# Altium PCB MACHIN2.PcbDoc
Units mm, origin at the board's own origin, x right, y up, seen from the top; angles counter-clockwise.
Board outline 83 x 53 mm, 4 copper layers (Top Layer, Internal Plane 1, Internal Plane 2, Bottom Layer), stack 0.462 mm thick; 6 components, 12 nets, 60 pads, 0 vias.
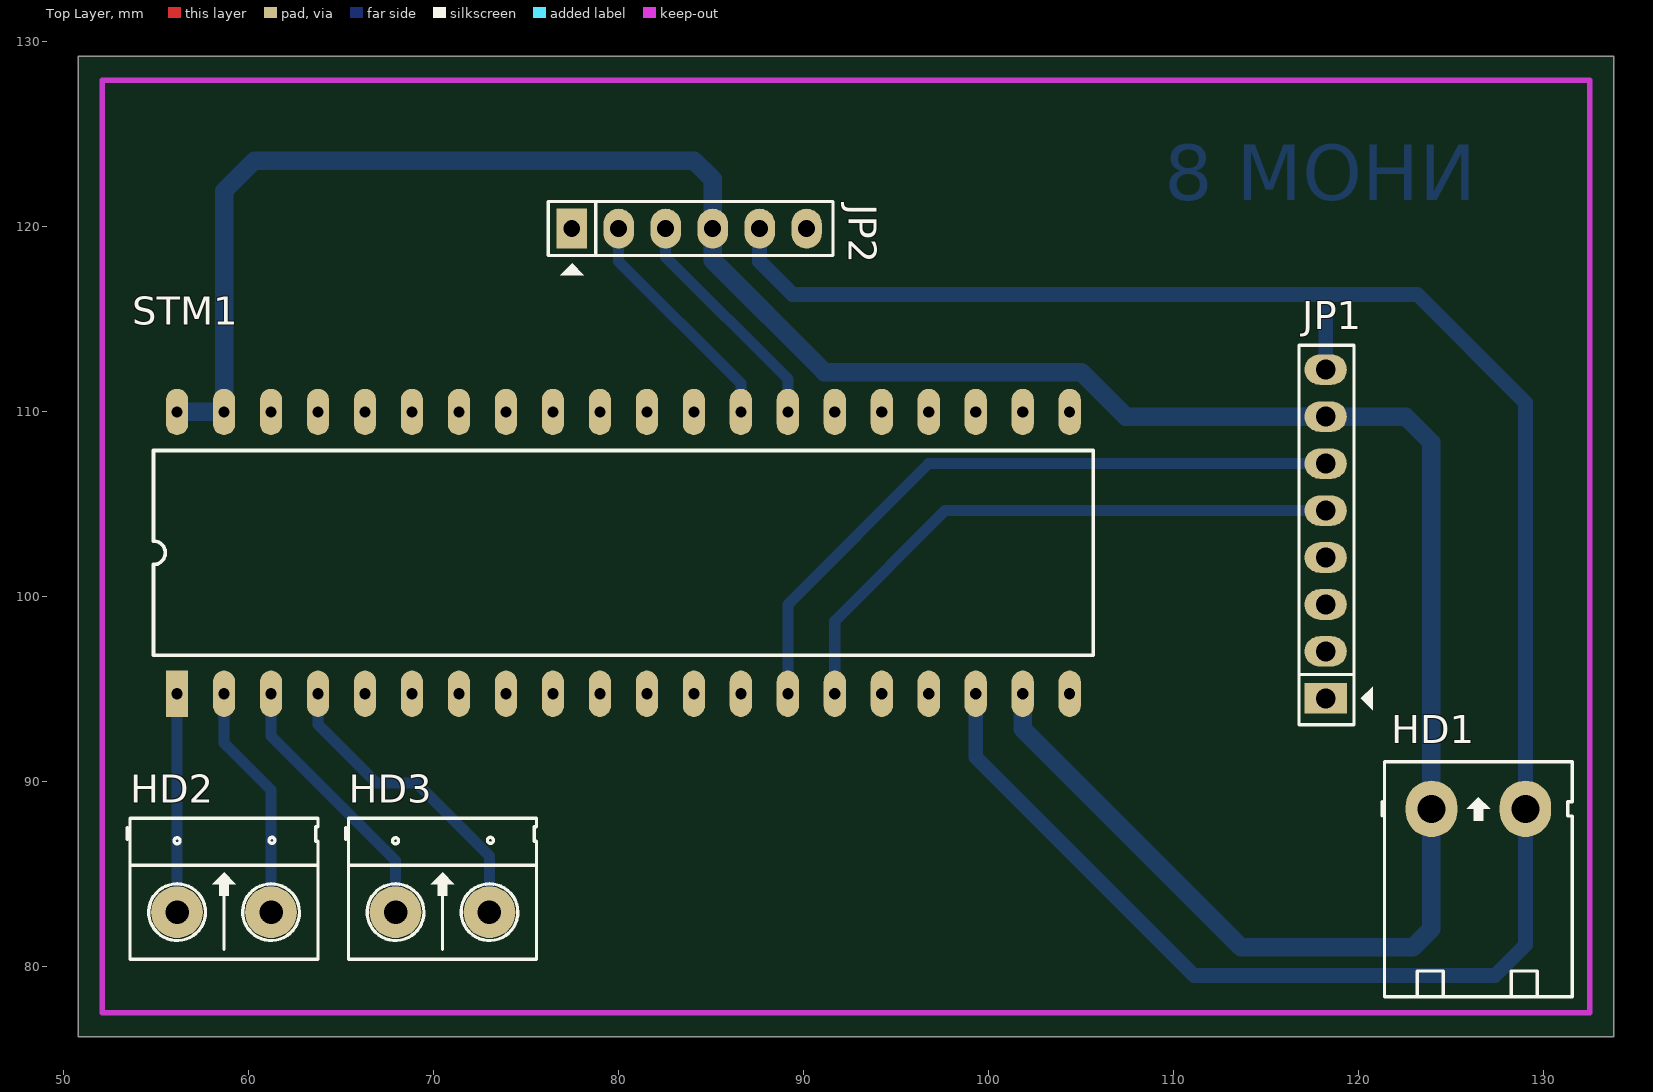
[diagram p0: Top Layer view]
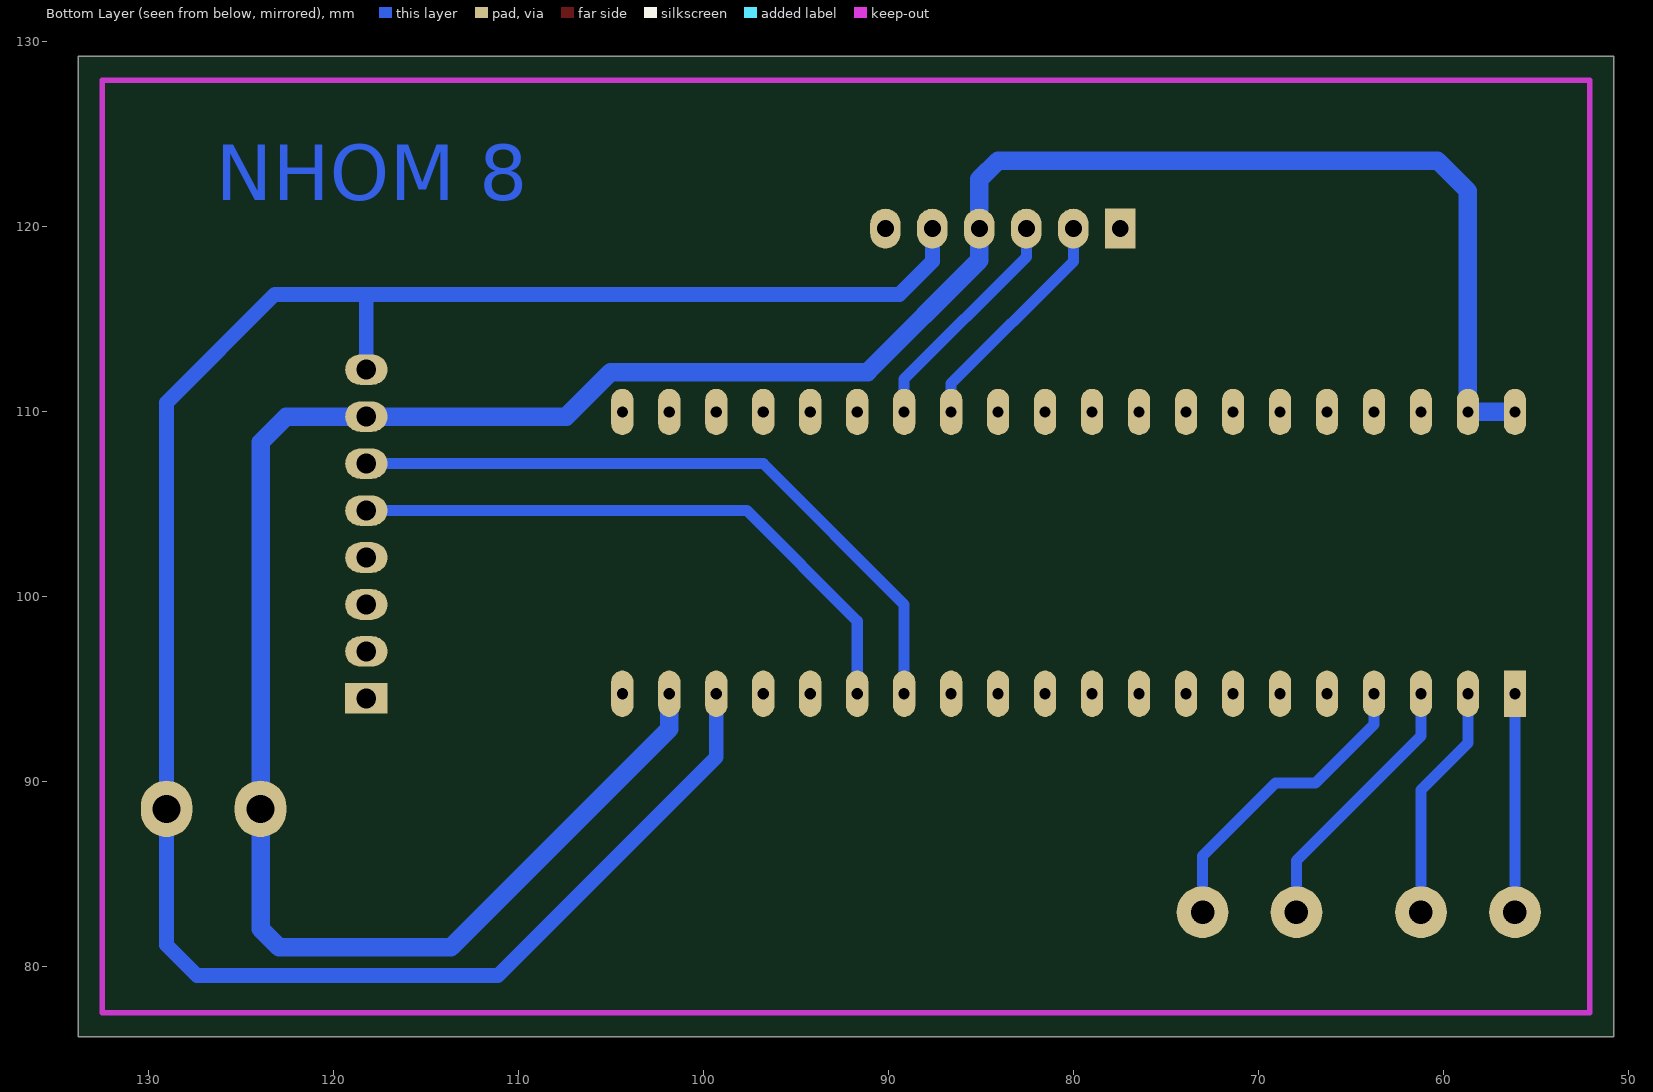
[diagram p1: Bottom Layer view, seen from below]
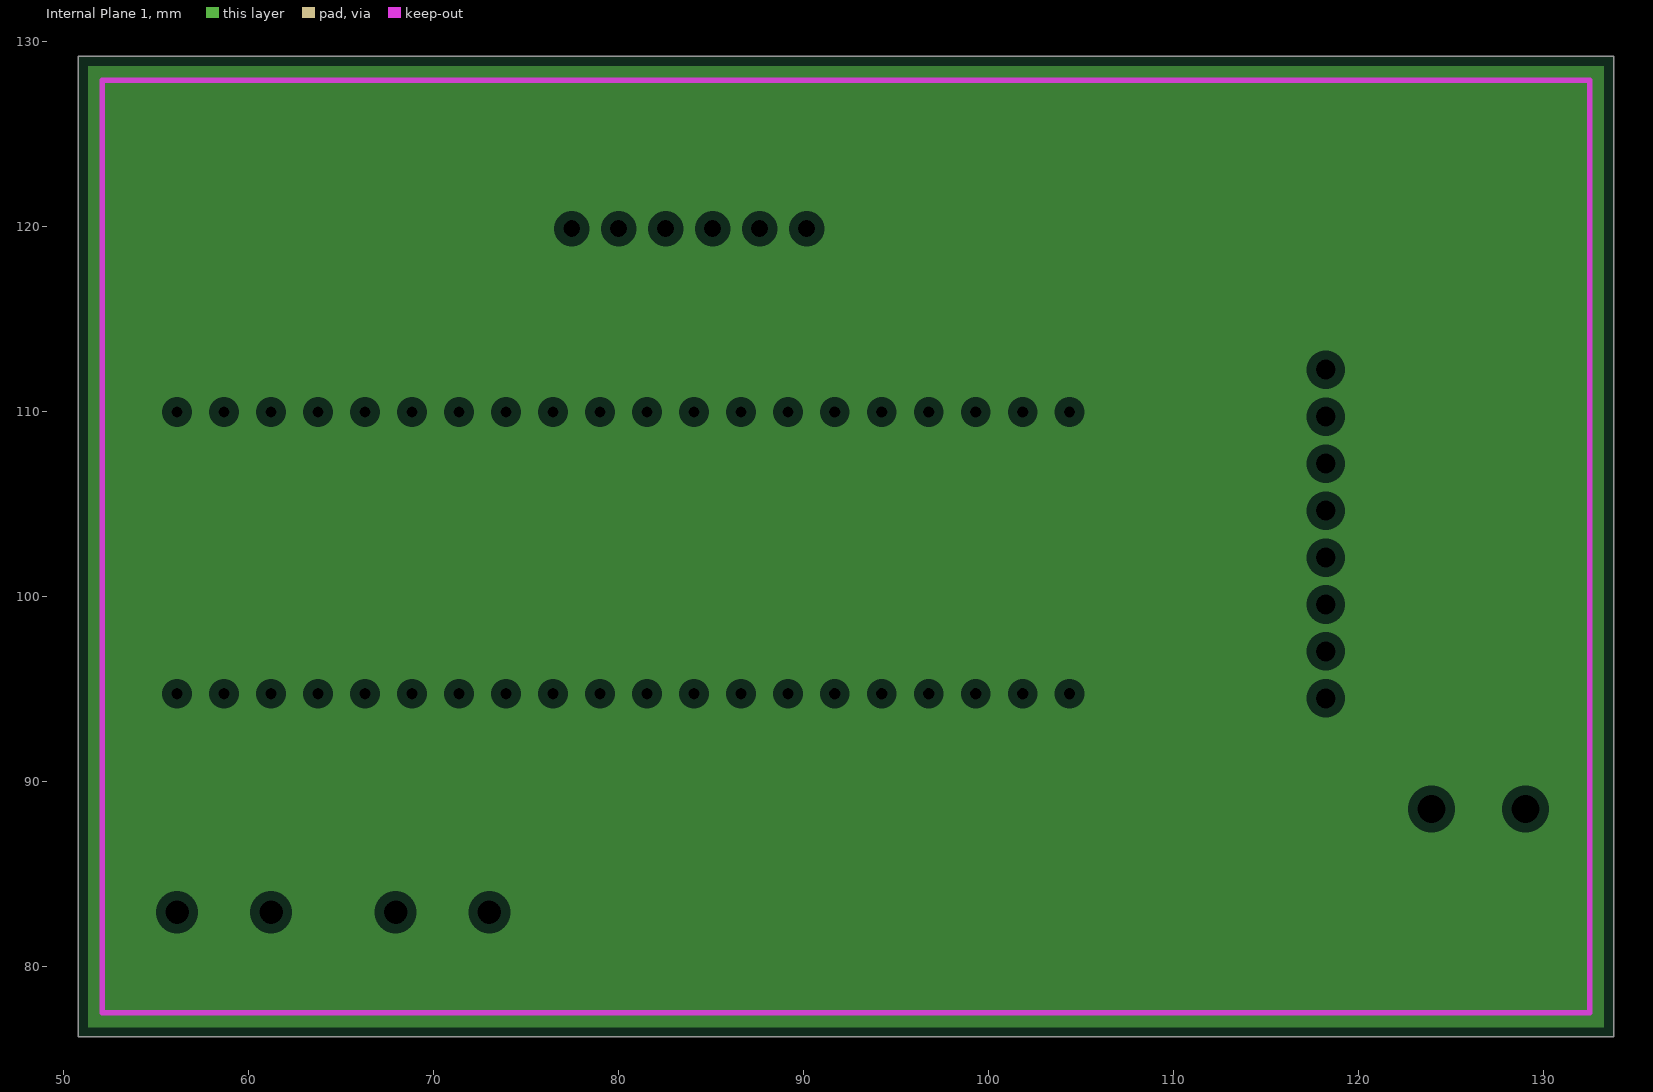
[diagram p2: Internal Plane 1, clearances drawn from the general rule]
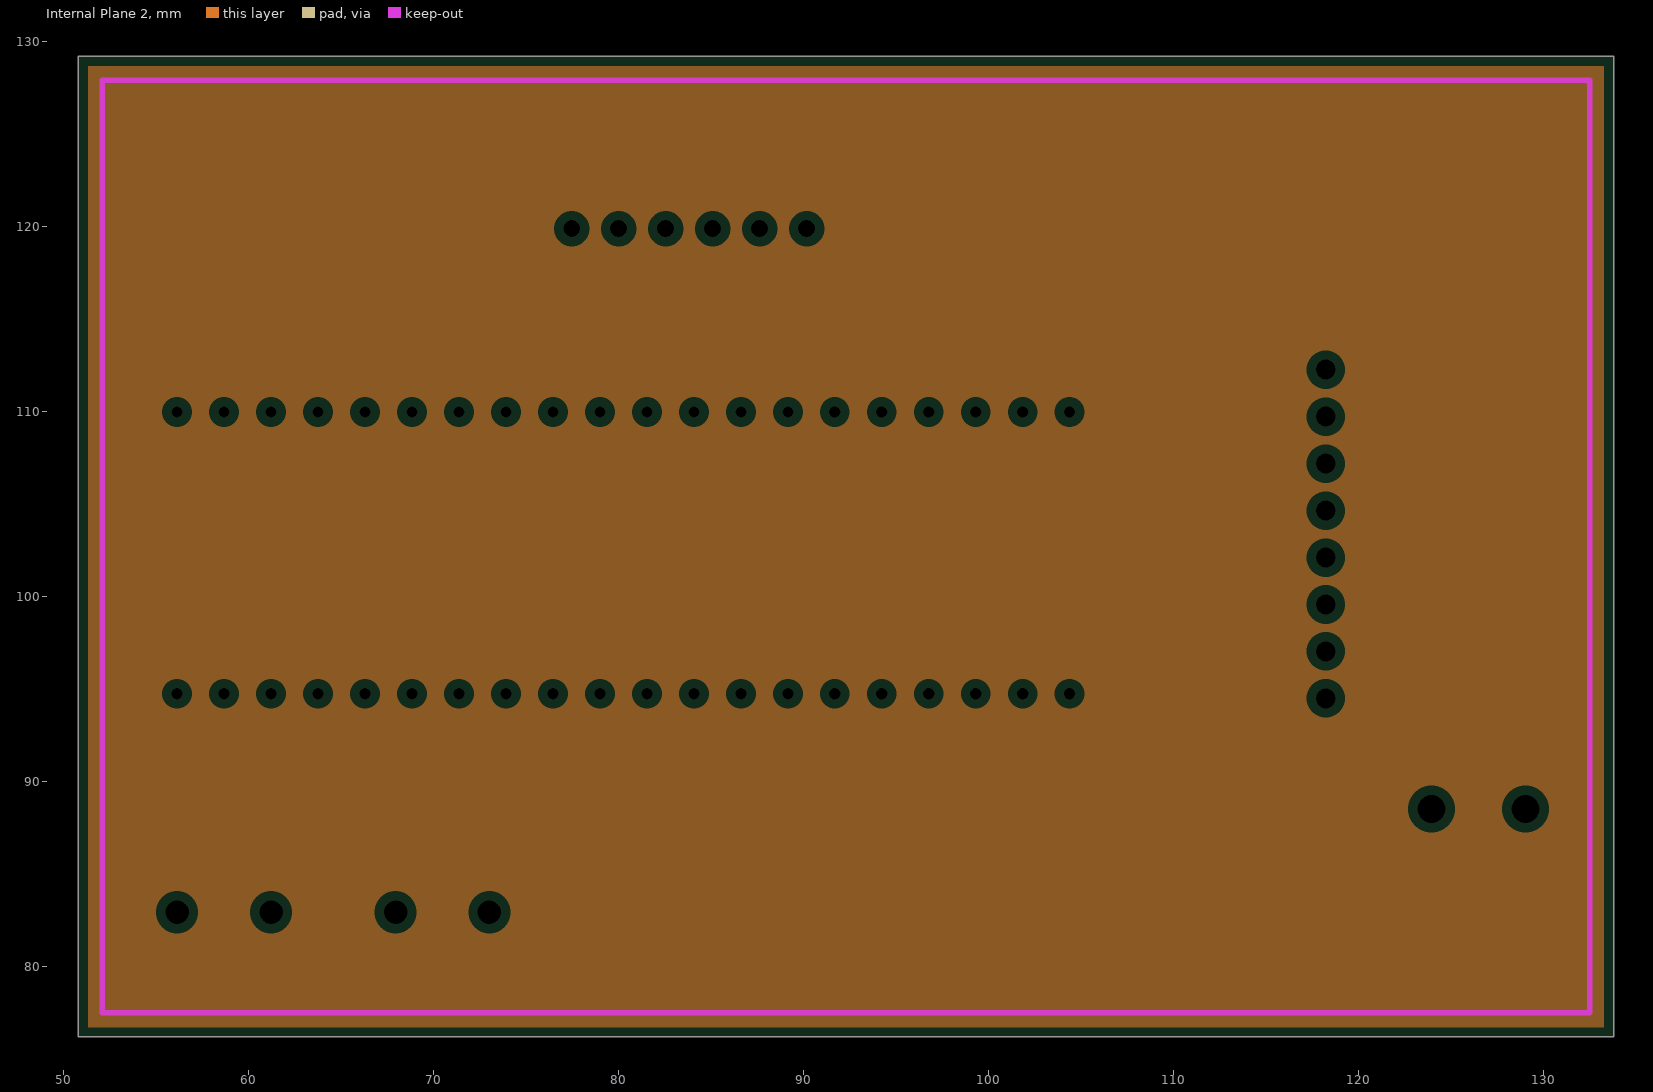
[diagram p3: Internal Plane 2, clearances drawn from the general rule]
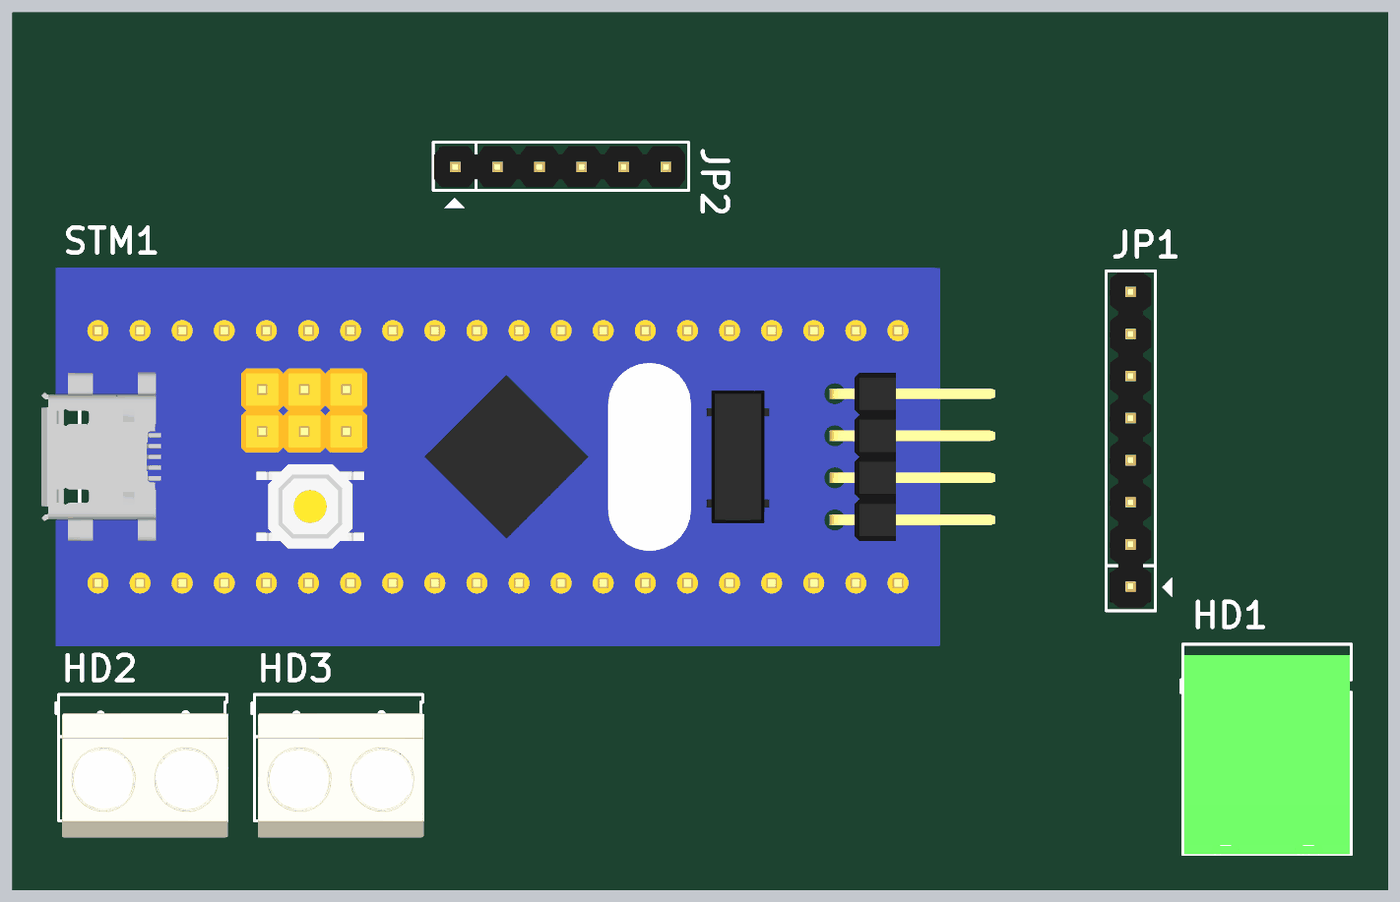
[diagram p4: 3D render of the assembled board from above, using the file's embedded part models]

## Layer stack, top to bottom
Top Solder: solder mask 0.0102, Solder Resist, Dk 3.5
Top Layer: signal copper 0.0356
Internal Plane 1: plane copper 0.0356
Internal Plane 2: plane copper 0.0356
Dielectric 1: dielectric 0.32, FR-4, Dk 4.8
Bottom Layer: signal copper 0.0356
Bottom Solder: solder mask 0.0102, Solder Resist, Dk 3.5

## Board outline
50.8,76.2 133.8,76.2 133.8,129.2 50.8,129.2

## Design rules (kind name [scope] priority, off if disabled: settings)
Clearance [All] p1: gap=0.4
PlaneClearance [All] p1: clearance=0.508
PlaneConnect [All] p1: planeconnectstyle=Relief reliefexpansion=0.508 reliefentries=4 reliefconductorwidth=0.254 reliefairgap=0.254
PolygonConnect [All] p1: connectstyle=Relief reliefconductorwidth=0.254 reliefentries=4 polygonreliefangle="90 Angle" airgapwidth=0.254
RoomDefinition MACHNGUYENLI [InComponentClass('MACHNGUYENLI')] p1: confinementstyle=ConfineIn formatcopy=TRUE lockcomponents=FALSE outline 0,0 50.8,0 50.8,25.4 0,25.4
RoutingVias [All] p1: holewidth=0.6 width=1 viastyle="Through Hole" minholewidth=0.711 minwidth=1.27 maxholewidth=0.711 maxwidth=1.27
SolderMaskExpansion [All] p1: expansion=0.102
Width GND [InNet('GND')] p1: maxlimit=1 minlimit=1 preferedwidth=1
Width 5V [InNet('5V')] p2: maxlimit=0.8 minlimit=0.8 preferedwidth=0.8
Width NET [All] p3: maxlimit=0.6 minlimit=0.6 preferedwidth=0.6
28 further rules are at their usual default settings.

## Components (designator, comment, footprint, x,y, rotation, side; value= is the part's Value field where it differs from the comment)
HD1 "Header 2" HED2T 123.952,88.519 r0 top
HD2 "" HED2 56.134,82.931 r0 top
HD3 "Header 2" HED2 67.945,82.931 r0 top
JP1 "JP8 PIN" JP8 118.237,94.488 r90 top
JP2 "JP6 PIN" JP6 77.47,119.888 r0 top
STM1 "KIT STM32F103C8T6" "STM32F103 KIT" 56.134,94.742 r90 top

## Footprints (in the part's own frame and the unit in brackets; to place one, negate y for a bottom-side part, rotate by r counter-clockwise, add the part's x,y. Pads: shape width x height; smd on the part's side, far side on the other; paste and mask are expansions set on the pad)
HED2 [mil] "Header 2, 2 pin, hight 300mil, Pin to Pin 200, Colour Green"
  round 110 hole 50: 1(0,0) 2(200,0)
  silkscreen extent -106,-100 300,200, body extent -92,-140 302,155, height 394
HED2T [mil]
  oval 110x120 hole 60: 1(0,0) 2(200,0)
  silkscreen extent -105,-400 300,100, body extent -97,-399 297,73, height 334
JP6 [mil] "JP6"
  rect 65x85 hole 36: 1(0,0)
  oval 65x85 hole 36: 2(100,0) 3(200,0) 4(300,0) 5(400,0) 6(500,0)
  silkscreen extent -50,-99 556,58, body extent -48,-50 548,48, height 323
JP8 [mil] "JP8"
  rect 65x90 hole 42: 1(0,0)
  oval 65x90 hole 42: 2(100,0) 3(200,0) 4(300,0) 5(400,0) 6(500,0) 7(600,0) 8(700,0)
  silkscreen extent -56,-100 752,57, body extent -48,-50 748,48, height 323
"STM32F103 KIT" [mm]
  rect 2.5x1.2 hole 0.6: 1(0,0)
  oval 2.5x1.2 hole 0.6: 2(0,-2.54) 3(0,-5.08) 4(0,-7.62) 5(0,-10.16) 6(0,-12.7) 7(0,-15.24) 8(0,-17.78) 9(0,-20.32) 10(0,-22.86) 11(0,-25.4) 12(0,-27.94) 13(0,-30.48) 14(0,-33.02) 15(0,-35.56) 16(0,-38.1) 17(0,-40.64) 18(0,-43.18) 19(0,-45.72) 20(0,-48.26) 21(15.24,-48.26) 22(15.24,-45.72) 23(15.24,-43.18) 24(15.24,-40.64) 25(15.24,-38.1) 26(15.24,-35.56) 27(15.24,-33.02) 28(15.24,-30.48) 29(15.24,-27.94) 30(15.24,-25.4) 31(15.24,-22.86) 32(15.24,-20.32) 33(15.24,-17.78) 34(15.24,-15.24) 35(15.24,-12.7) 36(15.24,-10.16) 37(15.24,-7.62) 38(15.24,-5.08) 39(15.24,-2.54) 40(15.24,0)
  silkscreen extent 2.08,-49.53 13.16,1.27, body extent -3.81,-53.97 19.05,3.59, height 16.12

## Part data
HD1 HD2 HD3: library part Hed2, "Header 2 (Green)"
JP1: library part JP8
JP2: library part JP6
STM1: library part "STM32f103 Bluepill", "KIT STM32F103C8T6 Bluepill"

## Nets (pads, with @x,y where several pads share a name; then routed paths per layer and width w, separated by ;. In a path a pad name is that pad's centre, name@x,y a point inside that pad or via, vN(x,y) a via of type N, cw(c..) or ccw(c..) an arc to the next point about the centre after c; other vN are vias at no path point)
5V: HD1.2 JP1.8 JP2.5 STM1.18 | length 118.5
  Bottom Layer w0.8: JP2.5 87.63,118.11 89.408,116.332 118.237,116.332 ; STM1.18 99.314,91.313 111.125,79.502 127.381,79.502 129.032,81.153 HD1.2 129.032,110.49 123.19,116.332 118.237,116.332 ; JP1.8 118.237,116.332
GND: HD1.1 JP1.7 JP2.4 STM1.19 STM1.39 STM1.40 | length 144.9
  Bottom Layer w1: STM1.40 STM1.39 58.674,121.92 60.325,123.571 84.074,123.571 85.09,122.555 JP2.4 85.09,118.177 91.135,112.132 105.015,112.132 107.419,109.728 JP1.7 122.555,109.728 123.952,108.331 HD1.1 123.952,82.042 122.936,81.026 113.665,81.026 101.854,92.837 STM1.19
OUT1: HD2.1 STM1.1 | length 11.8
  Bottom Layer w0.6: HD2.1 STM1.1
OUT2: HD2.2 STM1.2 | length 12.9
  Bottom Layer w0.6: STM1.2 58.674,92.075 61.214,89.535 HD2.2
OUT3: HD3.1 STM1.3 | length 14.6
  Bottom Layer w0.6: STM1.3 61.214,92.456 67.945,85.725 HD3.1
OUT4: HD3.2 STM1.4 | length 16.9
  Bottom Layer w0.6: STM1.4 63.754,93.091 66.929,89.916 69.088,89.916 73.025,85.979 HD3.2
RX: JP2.2 STM1.28 | length 12.8
  Bottom Layer w0.6: JP2.2 80.01,118.11 86.614,111.506 STM1.28 STM1.28@86.741,110.109
SCL: JP1.6 STM1.14 | length 37.1
  Bottom Layer w0.6: STM1.14 89.154,99.568 96.774,107.188 JP1.6
SDA: JP1.5 STM1.15 | length 33
  Bottom Layer w0.6: STM1.15 91.694,98.679 97.663,104.648 JP1.5
TIM1_CH1: STM1.5
TIM1_CH2: STM1.6
TX: JP2.3 STM1.27 | length 12.6
  Bottom Layer w0.6: JP2.3 82.55,118.364 89.154,111.76 STM1.27
pads on no net: JP1.1 JP1.2 JP1.3 JP1.4 JP2.1 JP2.6 STM1.7 STM1.8 STM1.9 STM1.10 STM1.11 STM1.12 STM1.13 STM1.16 STM1.17 STM1.20 STM1.21 STM1.22 STM1.23 STM1.24 STM1.25 STM1.26 STM1.29 STM1.30 STM1.31 STM1.32 STM1.33 STM1.34 STM1.35 STM1.36 STM1.37 STM1.38

## Keep-outs
Keep-Out Layer:
  lines w0.3: 52.1,77.5 132.5,77.5 132.5,127.9 52.1,127.9 52.1,77.5

## Other copper
Bottom Layer:
  text "NHOM 8" at 126.365,121.412 h3

## Silkscreen, mask and mechanical layers (free items; w line width, h text height)
Drill Drawing:
  text ".LEGEND" at 138.88,81.28 h1.52
  text "Drill Drawing." at 138.88,78.74 h1.52

## Dimensions
52.1,77.5 to 132.5,77.5 on Mechanical 1
52.1,77.5 to 52.1,127.9 on Mechanical 1